# EAGLE board openmv-mp (EAGLE 9.1.2)
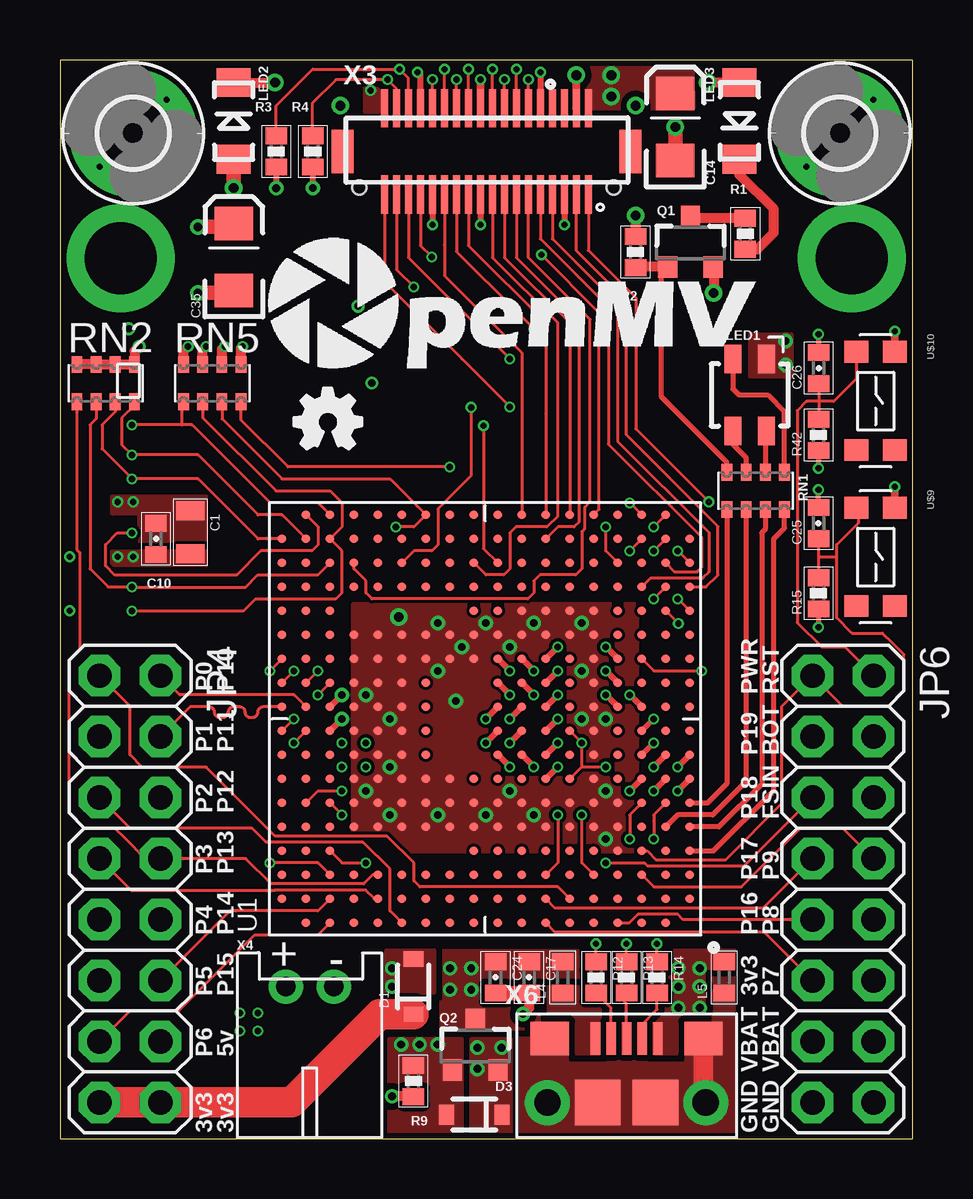
[diagram p0: board, top side]
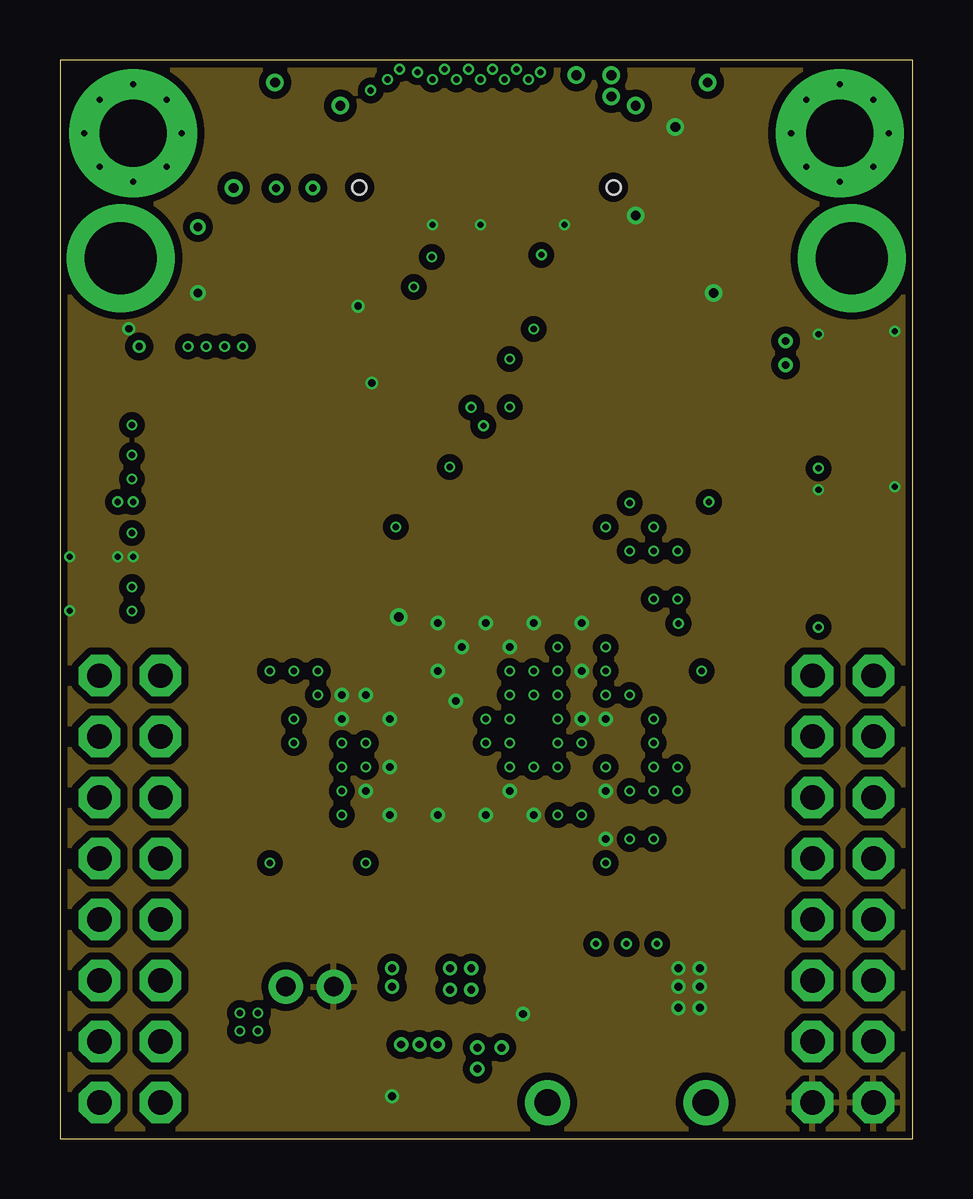
[diagram p1: board, inner layer GND]
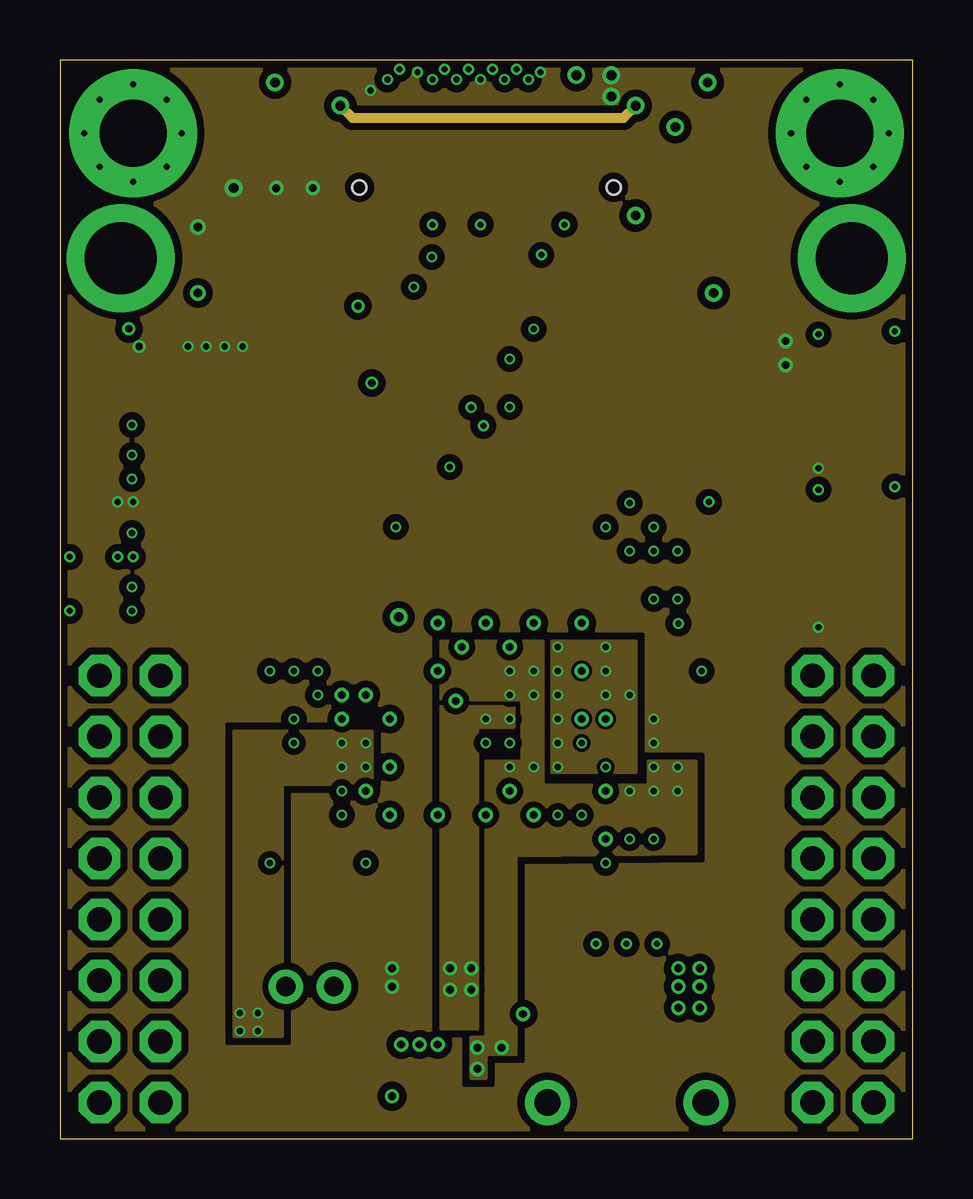
[diagram p2: board, inner layer 3V3]
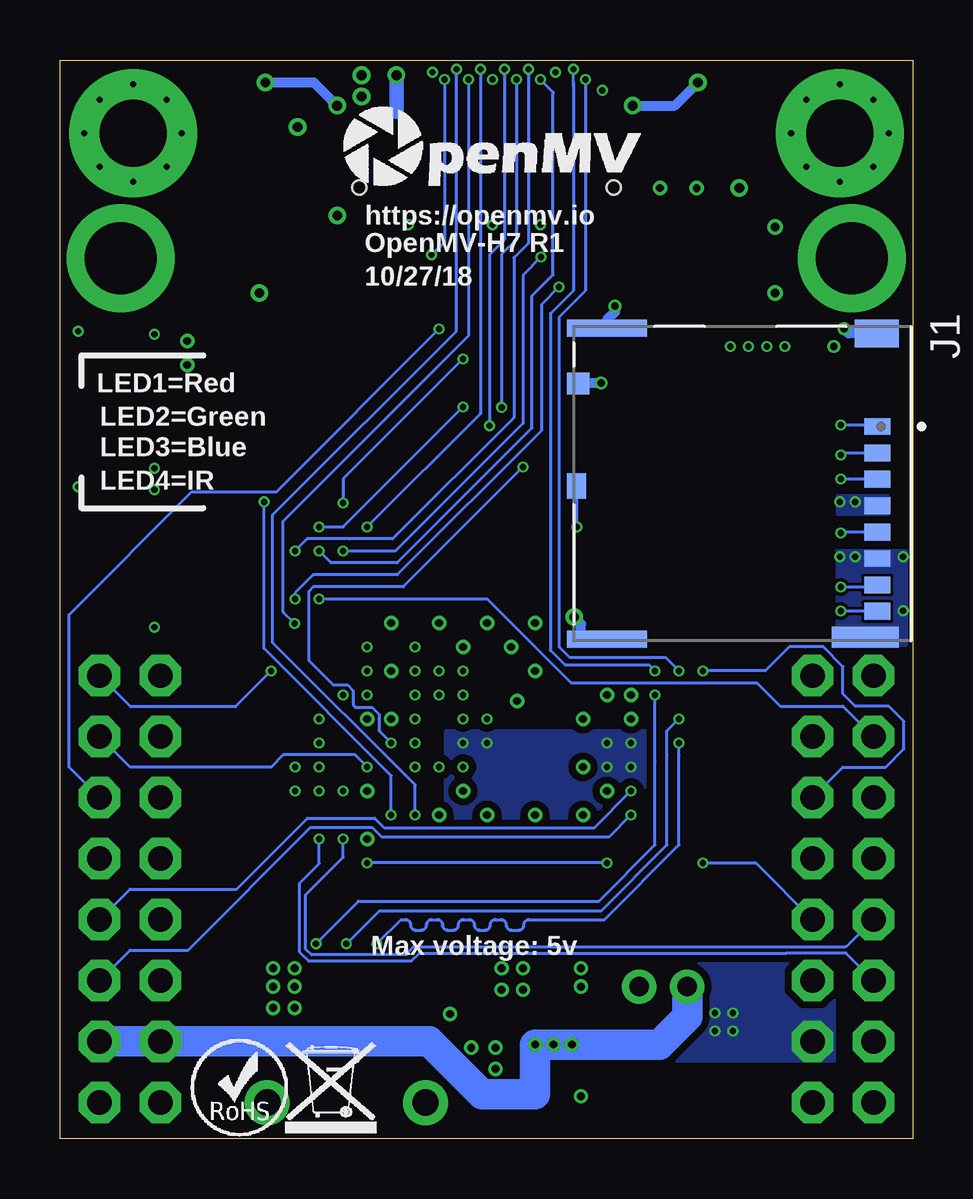
[diagram p3: board, bottom side, seen from below]

Size 35.56 x 44.96 mm. Coordinates in mm from the lower left corner, seen from the top.
Outline: 0,44.96 0,0 35.56,0 35.56,44.96 0,44.96
Copper layers (1*2+15*16): Top 0.035mm / dielectric 1.5mm / GND 0.035mm / dielectric 0.15mm / 3V3 0.035mm / dielectric 0.2mm / Bottom 0.035mm
Design rules "default": minimum track width 5mil, minimum drill 10mil, track to track 5mil, track to pad 5mil, pad to pad 5mil, via to via 5mil, smd to smd 5mil, copper to edge 5mil, drill to drill 10mil, minimum pad ring 10mil, minimum via ring 4mil, stop-mask expansion 2mil, vias tented up to drill 30mil, thermal gap 10mil

## Footprints (pad centres in the part's own frame; a part is rotated, then mirrored left to right if it is on the bottom)
0805 = smd 0.8 x 1.2: 1 -0.9,0; 2 0.9,0
0402-CAP = smd 0.7 x 0.9: 1 -0.65,0; 2 0.65,0
EIA3216 = smd 1.4 x 1.6: A 1.4,0; C -1.4,0
SOD-323 = smd 0.63 x 0.83: 1 -1.15,0; 2 1.15,0
2,8-PAD = drill 2.8 pad 5.334: B2,8 0,0
MOLEX_503398-1892 = smd 0.7 x 1.1: 1 -2.38,5.625; 2 -1.28,5.625; 3 -0.18,5.625; 4 0.92,5.625; 5 2.02,5.625; 6 3.12,5.625; 7 4.22,5.625; 8 5.32,5.625 | smd 0.9 x 0.93: 9 -4.17,-6.84 | smd 1.05 x 0.78: 10 0.095,-6.915 | smd 1.14 x 1.83: P1 -6.26,5.61 | smd 0.86 x 2.8: P2 6.4,5.125 | smd 0.7 x 3.33: P3 -6.48,-5.64; P4 6.48,-5.64
2X08 = drill 1.016 octagon: 1 -8.89,-1.27; 2 -8.89,1.27; 3 -6.35,-1.27; 4 -6.35,1.27; 5 -3.81,-1.27; 6 -3.81,1.27; 7 -1.27,-1.27; 8 -1.27,1.27; 9 1.27,-1.27; 10 1.27,1.27; 11 3.81,-1.27; 12 3.81,1.27; 13 6.35,-1.27; 14 6.35,1.27; 15 8.89,-1.27; 16 8.89,1.27
C0402 = smd 0.7 x 0.9: 1 -0.65,0; 2 0.65,0
LED-TRICOLOR-SMD-MF = smd 0.7 x 1.2: A 0.7,1.5; B 0.7,-1.5; G -0.7,-1.5; R -0.7,1.5
LED-1206 = smd 1.2 x 1.4: A -1.6,0; C 1.6,0
9774030151R = drill 3 pad 4.5: P$1 0,0
SOT23-3 = smd 0.8 x 0.9: 1 -0.95,-1; 2 0.95,-1; 3 0,1.1
0402-RES = smd 0.7 x 0.9: 1 -0.65,0; 2 0.65,0
EXBV8V = smd 0.45 x 0.7: 1 -1.2,-0.775; 2 -0.4,-0.775; 3 0.4,-0.775; 4 1.2,-0.775; 5 1.2,0.775; 6 0.4,0.775; 7 -0.4,0.775; 8 -1.2,0.775
OSD32MP15X-BGA-324 = smd 0.35 x 0.35: A2 -8.5,-7.5; A3 -8.5,-6.5; A4 -8.5,-5.5; A5 -8.5,-4.5; A6 -8.5,-3.5; A7 -8.5,-2.5; A8 -8.5,-1.5; A9 -8.5,-0.5; A10 -8.5,0.5; A11 -8.5,1.5; A12 -8.5,2.5; A13 -8.5,3.5; A14 -8.5,4.5; A15 -8.5,5.5; A16 -8.5,6.5; A17 -8.5,7.5; B1 -7.5,-8.5; B2 -7.5,-7.5; B3 -7.5,-6.5; B4 -7.5,-5.5; B5 -7.5,-4.5; B6 -7.5,-3.5; B7 -7.5,-2.5; B8 -7.5,-1.5; B9 -7.5,-0.5; B10 -7.5,0.5; B11 -7.5,1.5; B12 -7.5,2.5; B13 -7.5,3.5; B14 -7.5,4.5; B15 -7.5,5.5; B16 -7.5,6.5; B17 -7.5,7.5; B18 -7.5,8.5; C1 -6.5,-8.5; C2 -6.5,-7.5; C3 -6.5,-6.5; C4 -6.5,-5.5; C5 -6.5,-4.5; C6 -6.5,-3.5; C7 -6.5,-2.5; C8 -6.5,-1.5; C9 -6.5,-0.5; C10 -6.5,0.5; C11 -6.5,1.5; C12 -6.5,2.5; C13 -6.5,3.5; C14 -6.5,4.5; C15 -6.5,5.5; C16 -6.5,6.5; C17 -6.5,7.5; C18 -6.5,8.5; D1 -5.5,-8.5; D2 -5.5,-7.5; D3 -5.5,-6.5; D4 -5.5,-5.5; D5 -5.5,-4.5; D6 -5.5,-3.5; D7 -5.5,-2.5; D8 -5.5,-1.5; D9 -5.5,-0.5; D10 -5.5,0.5; D16 -5.5,6.5; D17 -5.5,7.5; D18 -5.5,8.5; E1 -4.5,-8.5; E2 -4.5,-7.5; E3 -4.5,-6.5; E4 -4.5,-5.5; E5 -4.5,-4.5; E6 -4.5,-3.5; E7 -4.5,-2.5; E8 -4.5,-1.5; E9 -4.5,-0.5; E10 -4.5,0.5; E11 -4.5,1.5; E12 -4.5,2.5; E13 -4.5,3.5; E14 -4.5,4.5; E15 -4.5,5.5; E16 -4.5,6.5; E17 -4.5,7.5; E18 -4.5,8.5; F1 -3.5,-8.5; F2 -3.5,-7.5; F3 -3.5,-6.5; F4 -3.5,-5.5; F5 -3.5,-4.5; F6 -3.5,-3.5; F7 -3.5,-2.5; F8 -3.5,-1.5; F9 -3.5,-0.5; F10 -3.5,0.5; F11 -3.5,1.5; F12 -3.5,2.5; F13 -3.5,3.5; F14 -3.5,4.5; F15 -3.5,5.5; F16 -3.5,6.5; F17 -3.5,7.5; F18 -3.5,8.5; G1 -2.5,-8.5; G2 -2.5,-7.5; G3 -2.5,-6.5; G4 -2.5,-5.5; G5 -2.5,-4.5; G6 -2.5,-3.5; G7 -2.5,-2.5; G8 -2.5,-1.5; G9 -2.5,-0.5; G10 -2.5,0.5; G11 -2.5,1.5; G12 -2.5,2.5; G13 -2.5,3.5; G14 -2.5,4.5; G15 -2.5,5.5; G16 -2.5,6.5; G17 -2.5,7.5; G18 -2.5,8.5; H1 -1.5,-8.5; H2 -1.5,-7.5; H3 -1.5,-6.5; H4 -1.5,-5.5; H5 -1.5,-4.5; H6 -1.5,-3.5; H7 -1.5,-2.5; H8 -1.5,-1.5; H9 -1.5,-0.5; H12 -1.5,2.5; H13 -1.5,3.5; H14 -1.5,4.5; H15 -1.5,5.5; H16 -1.5,6.5; H17 -1.5,7.5; H18 -1.5,8.5; J1 -0.5,-8.5; J2 -0.5,-7.5; J3 -0.5,-6.5; J4 -0.5,-5.5; J5 -0.5,-4.5; J6 -0.5,-3.5; J7 -0.5,-2.5; J8 -0.5,-1.5; J9 -0.5,-0.5; J12 -0.5,2.5; J13 -0.5,3.5; J14 -0.5,4.5; J15 -0.5,5.5; J16 -0.5,6.5; J17 -0.5,7.5; J18 -0.5,8.5; K1 0.5,-8.5; K2 0.5,-7.5; K3 0.5,-6.5; K4 0.5,-5.5; K5 0.5,-4.5; K6 0.5,-3.5; K7 0.5,-2.5; K8 0.5,-1.5; K9 0.5,-0.5; K12 0.5,2.5; K13 0.5,3.5; K14 0.5,4.5; K15 0.5,5.5; K16 0.5,6.5; K17 0.5,7.5; K18 0.5,8.5; L1 1.5,-8.5; L2 1.5,-7.5; L3 1.5,-6.5; L4 1.5,-5.5; L5 1.5,-4.5; L6 1.5,-3.5; L7 1.5,-2.5; L8 1.5,-1.5; L9 1.5,-0.5; L12 1.5,2.5; L13 1.5,3.5; L14 1.5,4.5; L15 1.5,5.5; L16 1.5,6.5; L17 1.5,7.5; L18 1.5,8.5; M1 2.5,-8.5; M2 2.5,-7.5; M3 2.5,-6.5; M4 2.5,-5.5; M5 2.5,-4.5; M6 2.5,-3.5; M7 2.5,-2.5; M8 2.5,-1.5; M9 2.5,-0.5; M10 2.5,0.5; M11 2.5,1.5; M12 2.5,2.5; M13 2.5,3.5; M14 2.5,4.5; M15 2.5,5.5; M16 2.5,6.5; M17 2.5,7.5; M18 2.5,8.5; N1 3.5,-8.5; N2 3.5,-7.5; N3 3.5,-6.5; N4 3.5,-5.5; N5 3.5,-4.5; N6 3.5,-3.5; N7 3.5,-2.5; N8 3.5,-1.5; N9 3.5,-0.5; N10 3.5,0.5; N11 3.5,1.5; N12 3.5,2.5; N13 3.5,3.5; N14 3.5,4.5; N15 3.5,5.5; N16 3.5,6.5; N17 3.5,7.5; N18 3.5,8.5; P1 4.5,-8.5; P2 4.5,-7.5; P3 4.5,-6.5; P4 4.5,-5.5; P5 4.5,-4.5; P6 4.5,-3.5; P7 4.5,-2.5; P8 4.5,-1.5; P9 4.5,-0.5; P10 4.5,0.5; P16 4.5,6.5; P17 4.5,7.5; P18 4.5,8.5; R1 5.5,-8.5; R2 5.5,-7.5; R3 5.5,-6.5; R4 5.5,-5.5; R5 5.5,-4.5; R6 5.5,-3.5; R7 5.5,-2.5; R8 5.5,-1.5; R9 5.5,-0.5; R10 5.5,0.5; R11 5.5,1.5; R12 5.5,2.5; R13 5.5,3.5; R14 5.5,4.5; R15 5.5,5.5; R16 5.5,6.5; R17 5.5,7.5; R18 5.5,8.5; T1 6.5,-8.5; T2 6.5,-7.5; T3 6.5,-6.5; T4 6.5,-5.5; T5 6.5,-4.5; T6 6.5,-3.5; T7 6.5,-2.5; T8 6.5,-1.5; T9 6.5,-0.5; T10 6.5,0.5; T11 6.5,1.5; T12 6.5,2.5; T13 6.5,3.5; T14 6.5,4.5; T15 6.5,5.5; T16 6.5,6.5; T17 6.5,7.5; T18 6.5,8.5; U1 7.5,-8.5; U2 7.5,-7.5; U3 7.5,-6.5; U4 7.5,-5.5; U5 7.5,-4.5; U6 7.5,-3.5; U7 7.5,-2.5; U8 7.5,-1.5; U9 7.5,-0.5; U10 7.5,0.5; U11 7.5,1.5; U12 7.5,2.5; U13 7.5,3.5; U14 7.5,4.5; U15 7.5,5.5; U16 7.5,6.5; U17 7.5,7.5; U18 7.5,8.5; V2 8.5,-7.5; V3 8.5,-6.5; V4 8.5,-5.5; V5 8.5,-4.5; V6 8.5,-3.5; V7 8.5,-2.5; V8 8.5,-1.5; V9 8.5,-0.5; V10 8.5,0.5; V11 8.5,1.5; V12 8.5,2.5; V13 8.5,3.5; V14 8.5,4.5; V15 8.5,5.5; V16 8.5,6.5; V17 8.5,7.5
KMS221G = smd 0.9 x 1: P$1 -2.05,0.8; P$2 2.05,0.8; P$3 -2.05,-0.8; P$4 2.05,-0.8
DF12-36-DS = smd 0.3 x 1.6: 1 4.25,-1.8; 2 4.25,1.8; 3 3.75,-1.8; 4 3.75,1.8; 5 3.25,-1.8; 6 3.25,1.8; 7 2.75,-1.8; 8 2.75,1.8; 9 2.25,-1.8; 10 2.25,1.8; 11 1.75,-1.8; 12 1.75,1.8; 13 1.25,-1.8; 14 1.25,1.8; 15 0.75,-1.8; 16 0.75,1.8; 17 0.25,-1.8; 18 0.25,1.8; 19 -0.25,-1.8; 20 -0.25,1.8; 21 -0.75,-1.8; 22 -0.75,1.8; 23 -1.25,-1.8; 24 -1.25,1.8; 25 -1.75,-1.8; 26 -1.75,1.8; 27 -2.25,-1.8; 28 -2.25,1.8; 29 -2.75,-1.8; 30 -2.75,1.8; 31 -3.25,-1.8; 32 -3.25,1.8; 33 -3.75,-1.8; 34 -3.75,1.8; 35 -4.25,-1.8; 36 -4.25,1.8 | smd 0.9 x 1.8: F1 6,0; F2 -6,0 | hole 0.6: 5.3,-1.5; -5.3,-1.5
JST-PH-2-THM-RA = drill 0.8 pad 1.422: 1 1,0; 2 -1,0
MICROUSB-RIGHT = smd 0.4 x 1.35: 1 -1.3,1.27; 2 -0.65,1.27; 3 0,1.27; 4 0.65,1.27; 5 1.3,1.27 | drill 1.1: S1 -3.3,-1.405; S2 3.3,-1.405 | smd 1.6 x 1.4: S3 -3.2,1.27; S4 3.2,1.27 | smd 1.9 x 1.9: S5 -1.2,-1.405; S6 1.2,-1.405

## Placement (x,y rotation side)
C1  22uF  [0805]  5.43,25.28 270 top
C10  0.1uF  [0402-CAP]  4,25.01 270 top
C14  47uF  [EIA3216]  25.65,42.16 90 top
C17  0.1uF  [0402-CAP]  19.56,6.73 270 top
C24  10uF  [0402-CAP]  18.16,6.73 270 top
C25  0.01uF  [0402-CAP]  31.62,25.66 90 top
C26  0.01uF  [0402-CAP]  31.63,32.12 90 top
C35  100uF  [EIA3216]  7.25,36.75 90 top
D1  SDM2U20SD3-7  [SOD-323]  14.73,6.35 90 top
D3  SDM2U20SD3-7  [SOD-323]  17.27,1.02 180 top
H1  MOUNT-PAD-ROUND2.8  [2,8-PAD]  3.05,41.91 90 top
H2  MOUNT-PAD-ROUND2.8  [2,8-PAD]  32.51,41.91 270 top
J1  503398-1892  [MOLEX_503398-1892]  7.11,27.3 270 bottom
JP4  [2X08]  2.92,10.41 270 top
JP6  [2X08]  32.64,10.41 270 top
L4  MPZ1608S181ATAH0  [C0402]  20.95,6.73 90 top
L5  MPZ1608S181ATAH0  [C0402]  27.69,6.73 90 top
LED1  LED-TRICOLOR  [LED-TRICOLOR-SMD-MF]  28.75,31 0 top
LED2  VSMY12850  [LED-1206]  7.24,42.42 90 top
LED3  VSMY12850  [LED-1206]  28.32,42.42 270 top
LOGO1  OSHW_LOGO_FILLX0100-NT  [OSHW_FILLX100_NOTEXT]  9.75,28.75 0 top
M1  9774030243R  [9774030151R]  2.54,36.7 0 top
M2  9774030243R  [9774030151R]  33.02,36.7 0 top
Q1  BSS138  [SOT23-3]  26.28,37.34 0 top
Q2  Si2301BDS  [SOT23-3]  17.31,3.88 0 top
R1  10R  [0402-RES]  28.57,37.72 270 top
R2  10K  [0402-RES]  24,36.96 270 top
R3  4.7K  [0402-RES]  9.02,41.15 90 top
R4  4.7K  [0402-RES]  10.54,41.15 90 top
R9  10K  [0402-RES]  14.73,2.41 90 top
R12  22R  [0402-RES]  22.35,6.73 270 top
R13  22R  [0402-RES]  23.62,6.73 270 top
R14  22R  [0402-RES]  24.89,6.73 270 top
R15  10K  [0402-RES]  31.62,22.74 90 top
R42  10K  [0402-RES]  31.62,29.34 90 top
RN1  220R  [EXBV8V]  29,27 180 top
RN2  10K  [EXBV8V]  1.91,31.5 0 top
RN5  10K  [EXBV8V]  6.35,31.5 0 top
U1  OSD32MP157C-512M-BAA  [OSD32MP15X-BGA-324]  17.75,17.5 90 top
U$1  [WEEE]  26.16,0.25 0 bottom
U$2  [ROHS]  30.1,0.13 0 bottom
U$3  [OMV-LOGO]  23.88,39.5 0 bottom
U$6  [OMV-LOGO-BIG]  8.7,32.12 0 top
U$9  SWITCHKMS221G  [KMS221G]  34,24.25 270 top
U$10  SWITCHKMS221G  [KMS221G]  34,30.75 270 top
X3  DF12-36-DS  [DF12-36-DS]  17.78,41.15 0 top
X4  S2B-PH-K-S(LF)(SN)  [JST-PH-2-THM-RA]  10.41,6.35 180 top
X6  MF-CON-MICROUSB-RIGHT  [MICROUSB-RIGHT]  23.62,2.92 0 top

## Library data of the parts
C1 C10 C14 C17 C24-C26 C35 D1 D3 L4 L5 LED1-LED3 Q1 Q2 R1-R4 R9 R12-R15 R42 = sfe
H1 H2 = holes
J1 = 503398-1892; AVAILABILITY: Good; DESCRIPTION: 1.10mm Pitch microSD Memory Card Connector, Normal Mount Surface Mount, Push-Push Type, 1.28mm Height; MF: Molex; MP: 5033981892; PACKAGE: None; PRICE: 1.67 USD
JP4 JP6 = pinhead
LOGO1 = iofault
M1 M2 = STANDOFFS
RN1 RN2 RN5 = resistor-dil; OC_FARNELL: unknown; OC_NEWARK: unknown
U1 = Octavo-Systems
U$1-U$3 U$6 = openmv
U$9 U$10 = mux
X3 = DF12
X4 = adafruit-updated
X6 = MF_Connectors

## Nets
3V3: C1.1 C10.1 C14.A C35.A D1.2 J1.4 LED1.A LED2.A R3.1 R4.1 R15.1 R42.1 RN2.5 RN2.6 RN2.7 RN2.8 RN5.5 RN5.6 RN5.7 RN5.8 U1.H3 U1.J3 X3.2 X3.10 X3.20 X3.30 X3.36
3V3_OUT: D1.1 JP4.15 JP4.16
BOOT: JP6.4 RN5.4 U1.G6 U1.J6
DAC1: JP4.12 U1.B16
DAC2: JP4.13 U1.A16
DCMI_CLK: U1.V5 X3.12
DCMI_D0: U1.V3 X3.31
DCMI_D1: U1.U3 X3.29
DCMI_D2: U1.V2 X3.35
DCMI_D3: U1.U2 X3.28
DCMI_D4: U1.T1 X3.26
DCMI_D5: U1.P1 X3.33
DCMI_D6: U1.T13 X3.24
DCMI_D7: U1.T9 X3.22
DCMI_D8: U1.R1 X3.3
DCMI_D9: U1.C5 X3.1
DCMI_D10: U1.R3 X3.7
DCMI_D11: U1.T2 X3.9
DCMI_FSIN: JP6.6 X3.23
DCMI_HSYNC: U1.T4 X3.18
DCMI_PCLK: U1.C7 X3.14
DCMI_PWDN: U1.V8 X3.25
DCMI_RST: U1.V7 X3.21
DCMI_VSYNC: U1.P2 X3.16
EEPROM_WP: U1.P4
GND: C1.2 C10.2 C14.C C17.2 C24.2 C25.2 C26.2 C35.C J1.6 J1.9 J1.P1 J1.P2 J1.P3 J1.P4 JP6.15 JP6.16 L5.2 Q1.2 R2.1 R9.1 U1.D4 U1.E4 U1.E5 U1.E6 U1.E7 U1.E8 U1.E9 U1.E10 U1.E11 U1.E12 U1.E13 U1.E14 U1.E15 U1.F4 U1.F5 U1.F6 U1.F7 U1.F8 U1.F9 U1.F10 U1.F11 U1.F12 U1.F13 U1.F14 U1.F15 U1.G5 U1.G11 U1.G12 U1.G13 U1.G14 U1.G15 U1.H5 U1.H13 U1.H14 U1.H15 U1.J5 U1.J13 U1.J14 U1.J15 U1.J16 U1.K5 U1.K13 U1.K14 U1.K15 U1.K16 U1.L5 U1.L13 U1.L14 U1.L15 U1.M5 U1.M10 U1.M11 U1.M12 U1.M13 U1.M14 U1.M15 U1.N5 U1.N6 U1.N7 U1.N8 U1.N9 U1.N10 U1.N11 U1.N12 U1.N13 U1.N14 U1.N15 U1.P5 U1.P6 U1.P7 U1.P8 U$9.P$1 U$10.P$1 X3.5 X3.19 X3.27 X4.2 X6.5
I2C2_SCL: JP4.9 U1.F3
I2C2_SDA: JP4.11 U1.F2
I2C5_SCL: R3.2 U1.L17 X3.32
I2C5_SDA: R4.2 U1.L18 X3.34
LED_B: RN1.7 U1.E1
LED_G: RN1.6 U1.E2
LED_IR: RN1.5 U1.F1
LED_R: RN1.8 U1.D1
N$4: JP6.3
N$5: Q1.1 R2.2 RN1.4
N$6: LED1.B RN1.2
N$8: LED1.R RN1.1
N$9: LED1.G RN1.3
N$10: LED3.C R1.2
N$14: Q1.3 R1.1
N$17: LED2.C LED3.A
N$34: L4.1 X6.1
N$35: R12.2 X6.2
N$36: R13.2 X6.3
N$37: R14.2 X6.4
N$38: L5.1 X6.S1 X6.S2 X6.S3 X6.S4 X6.S5 X6.S6
NRST: C26.1 JP6.2 R42.2 U1.M3 U$10.P$3
OTG_HS_DN: R12.1 U1.J17
OTG_HS_DP: R13.1 U1.J18
OTG_HS_ID: R14.1 U1.L16
PONKEY: C25.1 JP6.1 R15.2 U1.D3 U$9.P$3
RSVD5: X3.8
RSVD6: X3.6
SDMMC1_CK: J1.5 U1.V17
SDMMC1_CMD: J1.3 RN2.3 U1.U18
SDMMC1_D0: J1.7 RN2.2 U1.T16
SDMMC1_D1: J1.8 RN5.2 U1.U16
SDMMC1_D2: J1.1 RN5.1 U1.V16
SDMMC1_D3: J1.2 RN2.4 U1.U17
SDMMC2_CK: U1.T12
SDMMC2_CMD: U1.U15
SDMMC2_D0: U1.T14
SDMMC2_D1: U1.V13
SDMMC2_D2: U1.V14
SDMMC2_D3: U1.U14
SDMMC2_D4: U1.T17
SDMMC2_D5: U1.U12
SDMMC2_D6: U1.V15
SDMMC2_D7: U1.T11
SPI2_MISO: JP4.3 U1.R2
SPI2_MOSI: JP4.1 U1.B6
SPI2_NSS: JP4.7 U1.B14
SPI2_SCLK: JP4.5 U1.A13
SPI3_MISO: U1.V6 X3.15
SPI3_MOSI: U1.T10 X3.17
SPI3_SCLK: U1.U7 X3.13
SPI3_SSEL: U1.T15 X3.11
SPI6_MISO: JP6.9 U1.A4
SPI6_MOSI: JP6.11 U1.A7
SPI6_NSS: JP6.5 U1.D16
SPI6_SCLK: JP6.7 U1.B7
TIM2_CH2: JP4.10 U1.C16
TIM4_CH1: JP6.12 U1.F16
TIM4_CH2: JP6.10 U1.F17
TIM4_CH3: JP6.8 U1.C3
UART4_RX: JP4.6 U1.M18
UART4_TX: JP4.8 RN2.1 U1.C14
USBH_DM: JP4.4 U1.K18
USBH_DP: JP4.2 U1.K17
USD_DETECT: J1.10 RN5.3 U1.V12
VBAT: D3.2 JP6.13 JP6.14 Q2.1 R9.2 X4.1
VBUS: C17.1 C24.1 L4.2 Q2.3 U1.K8 U1.K9
VBUS_SW: JP4.14 U1.J8 U1.J9
VDD: U1.G7 U1.H7 U1.J7 U1.K3 U1.K4 U1.K7 U1.L4 U1.L7 U1.M4 U1.M7
VDDA: X3.4
VIN: D3.1 Q2.2 U1.G1 U1.G2 U1.G3 U1.H1 U1.H2 U1.H8 U1.H9 U1.L8 U1.L9 U1.M8 U1.M9

## Tracks (layer width: path | path; a pad name or v marks a point on that pad's centre or on a via)
3V3  (via drill 0.25, 0.3, 0.33, 0.35, 0.41)
  Top 0.203: v24.75,17.5 U1.J3 | U1.H3 v24.75,16.5 | R15.1 v31.62,21.33 | R42.1 v31.62,27.94
  Top 0.254: R4.1 v10.54,39.62 | R3.1 v9.02,39.62 | X3.30 15.03,44.32 v14.9,44.45 | v20.03,44.45 X3.10
  Top 0.305: X3.20 v17.53,44.15
  Top 0.406: v3.3,33.02 3.1,32.82 RN2.5 RN2.6 RN2.7 RN2.8 | RN5.8 5.15,32.84 v5.33,33.02 | RN5.7 5.95,32.87 v6.1,33.02 | RN5.5 7.55,32.95 v7.62,33.02 | RN5.6 6.75,32.91 v6.86,33.02
  Top 0.61: LED2.A v7.24,39.62 | v5.75,38 7.1,38 C35.A
  other vias: 3.05,26.54 2.41,26.54 30.25,33.25 30.25,32.25 22.99,44.32 22.99,43.43 12.95,43.69 13.84,7.11 13.84,6.35
  pour Top (no thermals): 2.16,26.8 6.1,26.8 6.1,24.89 3.3,24.89 3.3,26.04 2.16,26.04
  pour Bottom (no thermals): 1.02,26.8 3.17,26.8 3.17,26.04 1.02,26.04
  pour 3V3 (isolate 0.305, rank 6): 0.38,0.38 0.38,44.58 35.18,44.58 35.18,0.38
  pour Top (isolate 0.254, no thermals): 28.75,33.53 28.75,31.75 30.5,31.75 30.5,33.53
  pour Top (isolate 0.254, no thermals): 21.97,44.7 21.97,42.93 26.42,42.93 26.42,44.7
  pour Top (isolate 0.254, no thermals): 12.7,44.07 12.7,42.8 13.65,42.8 13.65,44.07
  pour Top (isolate 0.254, no thermals): 13.59,7.87 13.59,6.1 15.62,6.1 15.62,7.87
3V3_OUT
  Top 1.27: JP4.15 JP4.16 9.65,1.52 13.33,5.2 D1.1
BOOT  (via drill 0.25)
  Top 0.127: U1.J6 v21.75,16.5 21.75,15.5 | v16.25,28 9.5,28 7.55,29.95 RN5.4 | U1.G6 21.75,15.5 | 21.75,15.5 v22.75,15.5
  Bottom 0.127: v16.25,28 21.25,23 25,23 25.2,22.8 25.2,19.95 24.17,18.92 23.58,18.92 23.33,18.67 23.33,18.08 23.24,17.99 22.55,17.99 22.26,17.7 | JP6.4 32.64,15.49 26.76,15.49 26.25,16 23.25,16 v22.75,15.5 | v21.75,16.5 22.26,17.01 22.26,17.5 | 22.26,17.7 22.26,17.5 | 22.26,17.7 22.26,17.5
DAC1
  Top 0.127: U1.B16 10.75,9.5 7.34,9.5 7.09,9.5 JP4.12
DAC2
  Top 0.127: U1.A16 10.75,8.5 8.12,8.5 4.95,5.33 2.92,5.33 JP4.13
DCMI_CLK  (via drill 0.25)
  Top 0.127: X3.12 v19.53,44.15 | v20.07,36.84 22.48,34.42 22.48,26.23 U1.V5
  Bottom 0.127: v19.53,44.15 19.53,37.37 v20.07,36.84
DCMI_D0  (via drill 0.25)
  Top 0.127: X3.31 14.53,36.72 v18.75,32.5 | U1.V3 v23.75,26.5
  Bottom 0.127: v18.75,32.5 23.75,27.5 v23.75,26.5
DCMI_D1  (via drill 0.25)
  Top 0.127: X3.29 15.03,37.22 v15.5,36.75 | U1.U3 v23.75,24.5
  Bottom 0.127: v23.75,24.5 21.57,24.5 16.26,29.82 16.26,35.99 v15.5,36.75
DCMI_D2  (via drill 0.25)
  Top 0.127: v18.75,30.5 16.75,32.5 13.53,35.72 X3.35 | U1.V2 v24.75,25.5
  Bottom 0.127: v18.75,30.5 23.75,25.5 v24.75,25.5
DCMI_D3  (via drill 0.25)
  Top 0.127: X3.28 v15.53,44.15 | U1.U2 v24.75,24.5
  Bottom 0.127: v24.75,24.5 24.25,24 21.5,24 15.88,29.62 15.88,35.12 15,36 15,43.56 | 15,43.56 15,43.58 | v15.53,44.15 15,43.62 15,43.56
DCMI_D4  (via drill 0.25)
  Top 0.127: X3.26 v16.03,44.58 | U1.T1 v25.75,24.5
  Bottom 0.127: v25.75,24.5 25.25,25 23.49,25 21.7,25 16.64,30.06 16.64,36.72 16.03,37.33 v16.03,44.58
DCMI_D5  (via drill 0.25)
  Top 0.127: U1.P1 v25.75,22.5 | X3.33 14.03,36.22 v14.75,35.5
  Bottom 0.127: v14.75,35.5 15.49,34.76 15.49,29.51 21.5,23.5 25,23.5 25.75,22.75 v25.75,22.5
DCMI_D6  (via drill 0.25)
  Top 0.127: X3.24 v16.53,44.15 | U1.T13 14.75,24.5 15.5,24.5 15.75,24.75 15.75,26.25 17.14,27.64 v17.14,30.48
  Bottom 0.127: v16.53,44.15 16.53,37.85 16.53,37.47 17.14,36.85 v17.14,30.48
DCMI_D7  (via drill 0.25)
  Top 0.127: X3.22 v17.03,44.58 | v17.65,29.72 17.65,24.6 U1.T9
  Bottom 0.127: v17.03,44.58 17.03,37.47 17.65,36.85 v17.65,29.72 | v17.65,29.72
DCMI_D8
  Top 0.127: U1.R1 26.94,23 27.43,23.5 27.43,25.53 23.62,29.34 23.62,34.92 21.53,37.02 X3.3
DCMI_D9  (via drill 0.25)  (1 unrouted)
  Top 0.127: U1.C5 21.75,11.5 v21.75,13.5 | v27.05,26.54 24,29.59 24,35.05 22.03,37.02 X3.1 | v27.05,26.54
  Bottom 0.127: v21.75,13.5 21.75,15.14 27.05,20.44 v27.05,26.54
DCMI_D10
  Top 0.127: U1.R3 24.63,23.38 26.81,23.38 27.05,23.62 27.05,25.27 23.24,29.08 23.24,34.8 20.53,37.51 X3.7
DCMI_D11
  Top 0.127: U1.T2 25.62,23.63 26.55,23.63 26.75,23.83 26.75,25.07 22.86,28.96 22.86,34.67 20.03,37.5 X3.9
DCMI_FSIN  (via drill 0.25)
  Top 0.127: v19.75,33.75 19,34.5 16.53,36.97 X3.23
  Bottom 0.127: JP6.6 35.18,15.49 35.18,21.84 30.06,26.96 26.54,26.96 v19.75,33.75
DCMI_HSYNC  (via drill 0.25)
  Top 0.127: X3.18 v18.03,44.58 | U1.T4 22.75,24.5 v22.75,25.5
  Bottom 0.127: v18.03,44.58 18.03,30.22 v22.75,25.5
DCMI_PCLK  (via drill 0.25)
  Top 0.127: X3.14 v19.03,44.58 | U1.C7 20.75,11.5 v20.75,13.5
  Bottom 0.127: v19.03,44.58 19.03,33.66 26.69,26 26.69,20.69 20.75,14.75 v20.75,13.5
DCMI_PWDN
  Top 0.127: X3.25 16.03,37.25 16.03,35.97 19.25,32.75 U1.V8
DCMI_RST
  Top 0.127: X3.21 17.03,37.22 20.25,34 20.25,30.23 U1.V7
DCMI_VSYNC  (via drill 0.25)
  Top 0.127: X3.16 v18.53,44.15 | v25.78,21.48 U1.P2
  Bottom 0.127: v18.53,44.15 18.53,33.47 24,28 26.12,25.87 26.25,25.75 26.25,21.95 v25.78,21.48
GND  (via drill 0.25, 0.3, 0.33, 0.35, 0.4, 0.41, 0.41 pad 0.61)
  Top 0.203: C25.2 v31.62,27.05 | C26.2 v31.63,33.52 v31.62,33.53
  Top 0.254: X3.19 v17.53,38.1 | X3.27 v15.53,38.1 | X3.5 v21.03,38.1 | U1.J16 v11.75,17.5 | U1.K16 v11.75,18.5
  Top 0.305: U$9.P$1 v34.8,27.18 | U$10.P$1 v34.8,33.65 v34.8,33.66
  Top 0.406: v24,38.48 R2.1 | v13.84,1.78 14.72,1.78 R9.1 | v27.25,35.25 27.25,36.32 Q1.2 | C17.2 19.56,5.46 v19.3,5.21
  Top 0.61: C14.C v25.65,42.16 | C17.2 C24.2 | v5.75,35.25 7.15,35.25 C35.C
  Bottom 0.406: J1.P1 2.68,33.56 v2.87,33.75 | J1.P3 12.75,34.13 12.42,34.46 v12.42,34.71 | J1.9 13.93,31.5 v13,31.5 | v14.12,21.75 13.84,21.47 13.84,21.09 13.57,20.82 J1.P4
  other vias: 25.78,6.35 26.67,6.35 25.78,5.46 26.67,5.46 21.75,21.5 21.75,19.5 21.75,17.5 22.75,14.5 18.75,14.5 19.75,13.5 17.75,13.5 15.75,13.5 13.75,13.5 12.75,14.5 13.75,15.5 16.5,18.25 13.75,17.5 12.75,18.5 15.75,21.5 17.75,21.5 18.75,20.5 19.75,21.5 3.05,24.26 2.41,24.26 15.75,19.5 16.75,20.5 22.75,17.5 22.75,12.5 26.67,7.11 25.78,7.11 0.41,22.01 0.41,24.26
  pour GND (isolate 0.305): 0,0 0,44.96 35.56,44.96 35.56,0
  pour Top (isolate 0.254, rank 5, no thermals): 24.78,3.55 24.78,7.86 28.11,7.86 28.11,7.11 26.85,7.11 26.84,3.55
  pour Top (no thermals): 24,20.2 24,12 12.25,12 12.25,22.25 24,22.25
  pour Bottom (no thermals): 0.27,24.51 3.17,24.51 3.17,20.57 0.27,20.57
  pour Top (no thermals): 2.16,24.51 6.1,24.51 6.1,23.88 2.16,23.88
I2C2_SCL  (via drill 0.25)
  Top 0.127: v23.75,12.5 23.75,13.5 U1.F3
  Bottom 0.127: v23.75,12.5 23.75,11.74 25.31,10.18 25.31,7.91 25.07,7.67 21.16,7.67 20.82,8.02 2.81,8.02 | 2.81,8.02 | JP4.9 2.78,8.02 2.81,8.02
I2C2_SDA  (via drill 0.25)
  Top 0.127: v24.75,12.5 24.75,13.25 24.75,13.5 U1.F2
  Bottom 0.127: JP4.11 2.79,7.75 5.28,7.75 20.57,7.75 20.9,7.42 25.2,7.42 25.57,7.79 25.57,10.66 24.75,11.48 v24.75,12.5
I2C5_SCL  (via drill 0.25)
  Top 0.127: X3.32 14.53,44.2 v14.15,44.58 10.54,44.58 9.02,43.05 R3.2 | v10.75,19.5 U1.L17
  Bottom 0.127: 14.15,43.85 14.15,44 | 14.15,44 v14.15,44.58 | 14.15,44 14.15,35.35 15.11,34.39 15.11,20.36 14.5,19.75 11,19.75 v10.75,19.5
I2C5_SDA  (via drill 0.25)
  Top 0.127: X3.34 14.03,43.76 v13.65,44.15 11.51,44.15 10.54,43.18 R4.2 | v9.75,19.5 U1.L18
  Bottom 0.127: v13.65,44.15 13.65,35.35 14.73,34.27 14.73,20.48 14.32,20.07 10.32,20.07 v9.75,19.5
LED_B
  Top 0.203: U1.E1 27.48,13 29.25,14.77 29.25,25.25 29.4,25.4 RN1.7
LED_G
  Top 0.203: RN1.6 28.6,14.88 27.22,13.5 25.75,13.5 U1.E2
LED_IR
  Top 0.203: U1.F1 27,14 27.71,14.71 27.8,14.8 RN1.5
LED_R
  Top 0.203: U1.D1 27.24,12 29.75,14.51 29.75,25 30.2,25.45 RN1.8
N$1  (via drill 0.25)
  other vias: 3.05,43.94
N$3  (via drill 0.25)
  other vias: 5.08,41.91
N$5
  Top 0.2: Q1.1 25.17,36.34 25.08,36.25 25.08,30.92 27.8,28.2 RN1.4
  Top 0.406: R2.2 24.03,36.34 Q1.1
N$6
  Top 0.203: RN1.2 29.4,29.45 LED1.B
N$8
  Top 0.203: 30.2,27.9 RN1.1 30.2,30.3 29.5,31 28.31,31 28.05,31.26 LED1.R
N$9
  Top 0.203: LED1.G 28.05,28.95 28.6,28.4 RN1.3
N$10
  Top 0.406: R1.2 29.07,37.07 29.75,37.75 29.75,38.75 28.32,40.18 LED3.C
N$14
  Top 0.406: R1.1 26.35,38.37 Q1.3
N$15  (via drill 0.25)
  other vias: 1.02,41.91
N$16  (via drill 0.25)
  other vias: 3.05,39.88
N$17  (via drill 0.41)
  Top 0.406: LED2.C v8.97,44.02 | LED3.A v27,44.02
  3V3 0.406: v24,43.05 23.5,42.55 12.19,42.55 v11.68,43.05
  Bottom 0.406: v11.68,43.05 9.93,43.05 v8.97,44.02 | v24,43.05 24.97,44.02 v27,44.02
N$18  (via drill 0.25)
  other vias: 4.45,43.31
N$19  (via drill 0.25)
  other vias: 1.65,43.31
N$20  (via drill 0.25)
  other vias: 1.65,40.51
N$21  (via drill 0.25)
  other vias: 4.45,40.51
N$22  (via drill 0.25)
  other vias: 32.51,43.94
N$23  (via drill 0.25)
  other vias: 30.48,41.91
N$24  (via drill 0.25)
  other vias: 34.54,41.91
N$25  (via drill 0.25)
  other vias: 32.51,39.88
N$26  (via drill 0.25)
  other vias: 31.11,43.31
N$27  (via drill 0.25)
  other vias: 31.11,40.51
N$28  (via drill 0.25)
  other vias: 33.91,43.31
N$29  (via drill 0.25)
  other vias: 33.91,40.51
N$34
  pour Top (isolate 0.254, rank 2, no thermals): 21.77,6.35 20.37,6.35 20.37,4.95 21.52,4.95 21.52,3.55 21.92,3.55 22.53,3.55 22.53,6.35
N$35
  Top 0.127: X6.2 22.97,5.46 R12.2
N$36
  Top 0.127: X6.3 23.62,5.64 23.4,5.86 R13.2
N$37
  Top 0.127: X6.4 24.27,4.78 24.89,5.4 R14.2
N$38
  Top 0.813: X6.S4 26.82,1.62 X6.S2
  pour Top (isolate 0.254, rank 6, no thermals): 19.05,0.11 19.05,7.86 28.09,7.86 28.09,0.11
NRST  (via drill 0.25)
  Top 0.127: JP6.2 32.71,20.5 31.75,20.5 30.73,21.52 30.73,30.35 31.11,30.73 31.62,30.73 | 31.62,30.73 32.26,30.73 33.2,31.68 U$10.P$3 | C26.1 31.63,30.74 | 31.63,30.74 31.62,30.73 | 31.63,30.74 R42.2 | U1.M3 24.75,19.5 v26.75,19.5
  Top 0.15: U$10.P$3 33.15,32.75 | C26.1
  Bottom 0.127: JP6.2 32.6,18 28.25,18 v26.75,19.5
OTG_HS_DN  (via drill 0.25)
  Top 0.127: R12.1 v22.35,8.13 | v9.75,16.5 U1.J17
  Bottom 0.127: v9.75,16.5 9.75,16 9.75,12.25 12.86,9.14 16,9.14 arc-90 16.22,8.92 arc90 16.44,8.7 16.74,8.7 arc90 16.96,8.92 arc-90 17.18,9.14 17.4,9.14 arc-90 17.62,8.92 arc90 17.84,8.7 18.06,8.7 arc90 18.29,8.92 arc-90 18.51,9.14 18.73,9.14 arc-90 18.95,8.92 arc90 19.17,8.7 19.39,8.7 arc90 19.61,8.92 arc-90 19.84,9.14 20.06,9.14 arc-90 20.28,8.92 arc90 20.5,8.7 20.72,8.7 arc90 20.94,8.92 arc-90 21.16,9.14 21.34,9.14 v22.35,8.13
OTG_HS_DP  (via drill 0.25)
  Top 0.127: R13.1 v23.62,8.13 | v9.75,17.5 U1.J18
  Bottom 0.127: v9.75,17.5 10.25,17 10.25,16 10.25,12.25 12.99,9.51 22.24,9.51 v23.62,8.13
OTG_HS_ID  (via drill 0.25)
  Top 0.127: v10.75,18.5 U1.L16 | R14.1 v24.89,8.13
  Bottom 0.127: v10.75,18.5 10.75,15.75 10.75,12.25 13.09,9.91 23.11,9.91 v24.89,8.13
PONKEY
  Top 0.127: 32.38,24.26 32.38,21.72 33.02,21.08 34.29,21.08 34.73,20.64 35.18,20.19 35.18,18.67 34.54,18.03 32.64,18.03 JP6.1 30.1,18.03 30.1,13.98 27.75,11.63 24.85,11.63 24.48,12 U1.D3 | 32.38,24.26 32.38,24.77 33.27,25.66 33.27,26.23 U$9.P$3 | C25.1 31.62,24.26 | 31.62,24.26 32.38,24.26 | 31.62,24.26 R15.2
SDMMC1_CK  (via drill 0.25)
  Top 0.127: U1.V17 10.75,25.5 10.75,24.75 10.5,24.5 8.37,24.5 7.37,23.5 2.29,23.5 1.91,23.88 1.91,24.77 2.39,25.25 v3,25.25
  Bottom 0.127: J1.5 2.96,25.29 v3,25.25
SDMMC1_CMD  (via drill 0.25)
  Top 0.127: U1.U18 8.25,25 5.75,27.5 v3,27.5 1.75,28.75 1.75,29.75 2.31,30.31 RN2.3
  Bottom 0.127: v3,27.5 1.5,27.5 J1.3
SDMMC1_D0  (via drill 0.25)
  Top 0.127: U1.T16 10.75,23.5 9.91,23.5 8.25,23.5 7.73,22.99 3.01,22.99 v3,23 2,23 1.25,23.75 1.25,29.75 1.5,30 RN2.2
  Bottom 0.127: v3,23 2,23 1.57,23 J1.7
SDMMC1_D1  (via drill 0.25)
  Top 0.127: v3,22 7.65,22 8.15,22.5 11.5,22.5 11.75,22.75 11.75,24.5 U1.U16 11.75,25.5 11.75,26.5 11.25,27 9,27 5.95,30.05 RN5.2
  Bottom 0.127: v3,22 1.5,22 J1.8
SDMMC1_D2  (via drill 0.25)
  Top 0.127: U1.V16 10.75,26.5 8.75,26.5 5.5,29.75 5.08,29.75 | 5.08,29.75 v3,29.75 | RN5.1 5.08,30.65 5.08,29.75
  Bottom 0.127: v3,29.75 2.75,29.75 1.55,29.75 J1.1
SDMMC1_D3  (via drill 0.25)
  Top 0.127: U1.U17 9.25,26 8.25,26 5.75,28.5 v3,28.5 2.58,28.92 2.58,30.05 3.1,30.57 RN2.4
  Bottom 0.127: v3,28.5 2.92,28.59 J1.2
SPI2_MISO  (via drill 0.25)
  Top 0.127: U1.R2 v24.75,22.5
  Bottom 0.127: v24.75,22.5 17.75,22.5 14.25,19 9.5,19 6.5,19 5.53,18.03 2.92,18.03 JP4.3
SPI2_MOSI
  Top 0.127: U1.B6 20.75,10.5 15,10.5 14.75,10.75 14.75,11.5 13.63,12.62 12.5,12.62 | JP4.1 2.92,18.03 2.92,16 3.43,15.49 6.1,15.49 8.97,12.62 12.5,12.62 | 12.74,12.62 12.5,12.62
SPI2_NSS
  Top 0.127: JP4.7 2.97,10.37 8.97,10.37 12.75,10.37 13.11,10 U1.B14
SPI2_SCLK
  Top 0.127: U1.A13 13.75,9.5 13.75,11.25 | JP4.5 2.92,12.95 8,12.95 8.59,12.37 12.63,12.37 13.75,11.25 | 13.75,11.25
SPI3_MISO
  Top 0.127: U1.V6 21.25,34 18.53,36.72 X3.15
SPI3_MOSI
  Top 0.127: X3.17 18.03,36.72 20.75,34 20.75,25.96 20.29,25.5 19,25.5 18.75,25.25 18.75,23.75 18.5,23.5 17.75,23.5 U1.T10
SPI3_SCLK
  Top 0.127: U1.U7 20.75,25.5 21.44,25.5 21.63,25.7 21.63,34.12 19.03,36.72 X3.13
SPI3_SSEL
  Top 0.127: X3.11 19.53,36.72 22.1,34.15 22.1,26.54 21.88,26.33 21.88,25.44 21.75,25.31 21.75,23.75 21.5,23.5 20,23.5 19.75,23.25 19.75,22.75 19.5,22.5 13,22.5 12.75,22.75 12.75,23.25 12.25,23.75 U1.T15
SPI6_MISO
  Top 0.127: U1.A4 23.73,9 24.1,9.37 25.75,9.37 25.97,9.14 JP6.9
SPI6_MOSI
  Top 0.127: U1.A7 20.62,8.63 29.34,8.63 JP6.11
SPI6_NSS  (via drill 0.25)
  Top 0.127: U1.D16 11.75,11.5 v12.75,11.5 | v22.75,11.5 24.37,11.5 24.49,11.38 28.53,11.38 JP6.5
  Bottom 0.127: v12.75,11.5 v22.75,11.5
SPI6_SCLK
  Top 0.127: U1.B7 20.62,9.63 29.32,9.63 JP6.7
TIM2_CH2  (via drill 0.25)
  Top 0.127: U1.C16 10.75,11.5 v8.75,11.5
  Bottom 0.127: v8.75,11.5 6.55,11.5 JP4.10
TIM4_CH1  (via drill 0.25)
  Top 0.127: U1.F16 v11.75,13.5
  Bottom 0.127: JP6.12 32.64,7.87 30.22,7.87 25.11,12.99 22.55,12.99 22.13,12.57 12.68,12.57 v11.75,13.5
TIM4_CH2  (via drill 0.25)
  Top 0.127: v11.75,14.5 10.75,14.5 U1.F17
  Bottom 0.127: v11.75,14.5 13.3,12.95 22.03,12.95 22.44,13.37 25.24,13.37 28.19,10.41 32.64,10.41 JP6.10
TIM4_CH3
  Top 0.127: JP6.8 32.64,12.95 30.86,12.95 28.41,10.5 24.75,10.5 U1.C3
UART4_RX  (via drill 0.25)
  Top 0.127: U1.M18 v8.75,19.5
  Bottom 0.127: v8.75,19.5 6.15,19.5 5.15,20.5 4.5,20.5 3.74,20.5 2.92,19.68 2.92,18.54 2.41,18.03 1.02,18.03 0.38,17.4 0.38,16.26 1.14,15.49 2.92,15.49 JP4.6
UART4_TX
  Top 0.127: RN2.1 0.7,24.56 0.83,24.43 0.83,20.57 0.83,20.39 0.76,20.32 0.45,20 0.38,19.94 0.38,13.59 1.02,12.95 2.29,12.95 2.74,12.5 3.56,11.68 JP4.8 7.75,11.68 8.8,10.63 12.67,10.63 13.03,11 U1.C14
USBH_DM
  Top 0.127: U1.K18 8.46,18 arc90 8.24,17.78 arc-90 8.02,17.55 7.94,17.55 arc-90 7.72,17.78 arc90 7.5,18 7.23,18 arc90 7.01,17.78 arc-90 6.79,17.55 6.67,17.55 arc-90 6.45,17.78 arc90 6.22,18 5.43,18 JP4.4
USBH_DP
  Top 0.127: U1.K17 9.75,18.5 5,18.5 JP4.2
USD_DETECT  (via drill 0.25)
  Top 0.127: v14,25.5 14.75,25.5 U1.V12 14.88,26.38 13.75,27.5 9.25,27.5 6.75,30 RN5.3
  Bottom 0.127: 14.07,27.25 J1.10 14.03,25.53 v14,25.5
VBAT  (via drill 0.33)
  Bottom 1.27: X4.1 9.41,5.09 10.56,3.94 v14.22,3.94 v14.99,3.94 v15.75,3.94 15.75,1.86 17.96,1.86 20.17,4.06 JP6.13 JP6.14
  pour Top (isolate 0.254, no thermals): 13.72,0.25 13.72,4.19 16.76,4.19 16.76,0.25
VBUS  (via drill 0.25, 0.33)
  Top 0.254: U1.K8 v18.75,17.5 | U1.K9 v17.75,17.5
  other vias: 16.26,7.11 17.14,7.11 17.14,6.22 16.26,6.22
  pour Top (isolate 0.254, rank 3, no thermals): 15.88,5.84 15.88,7.87 21.59,7.87 21.59,4.57 15.88,4.57
  pour 3V3 (isolate 0.254): 17.41,4.57 15.88,4.57 15.88,18.03 18.92,18.03 18.92,17.14 17.41,17.14
VBUS_SW  (via drill 0.25)
  Top 0.254: U1.J8 v18.75,16.5 | U1.J9 v17.75,16.5
  other vias: 11.75,16.5 12.75,16.5 12.75,15.5 11.75,15.5 7.5,4.5 7.5,5.25 8.25,5.25 8.25,4.5
  pour Bottom (isolate 0.305, no thermals): 3.25,3.25 3.25,17 19.5,17 19.5,15.75 19.5,3.25
  pour 3V3 (isolate 0.254, no thermals): 13,17 13,14.75 9.25,14.75 9.25,4.25 7.25,4.25 7.25,17
VDD  (via drill 0.25)
  Top 0.254: U1.L7 v20.75,19.5 | U1.K7 v20.75,18.5 | U1.J7 v20.75,17.5 | U1.H7 v20.75,16.5 | U1.G7 v20.75,15.5 | U1.L4 v22.75,19.5 | U1.K4 v22.75,18.5 | U1.K3 v23.75,18.5 | U1.M7 v20.75,20.5 | U1.M4 v22.75,20.5
  pour 3V3: 20.5,15.25 20.5,20.75 24,20.75 24,18.25 24,15.25
VDDA  (via drill 0.41)
  Top 0.33: X3.4 v21.53,44.33
  Bottom 0.61: v21.53,44.33 21.53,42.8
VIN  (via drill 0.25, 0.33)
  Top 0.254: U1.L9 v18.75,18.5 | U1.L8 v19.75,18.5 | U1.M8 v19.75,19.5 | U1.M9 v18.75,19.5 | U1.H8 v19.75,15.5 | U1.H9 v18.75,15.5 | U1.H1 v25.75,15.5 | U1.H2 v24.75,15.5 | U1.G3 v23.75,14.5 | U1.G2 v24.75,14.5 | U1.G1 v25.75,14.5
  other vias: 17.4,3.81 18.41,3.81 17.4,2.92
  pour Top (isolate 0.254, no thermals): 17.14,0.25 17.14,4.19 18.8,4.19 18.8,0.25
  pour 3V3 (isolate 0.254): 15.89,20.75 20.13,20.75 20.13,14.75 24.53,14.75 24.53,15.75 26.5,15.75 26.5,11.87 19,11.78 19,3.5 17.75,3.51 17.75,2.5 17.25,2.5 17.14,2.5 17.14,3.42 17.14,4.25 17.75,4.25 17.75,15.75 19.25,15.75 19.25,18.29 15.89,18.29

## Text on the board
tPlace: P0 | P10 | PWR | RST | P1 | P11 | P19 | BOT | P2 | P12 | P18 | FSIN | P3 | P13 | P17 | P9 | P4 | P14 | P16 | P8 | P5 | P15 | 3v3 | P7 | P6 | 5v | VBAT | VBAT | 3v3 | 3v3 | GND | GND
bPlace: https://openmv.io | OpenMV-H7 R1 | 10/27/18 | LED1=Red | LED2=Green | LED3=Blue | LED4=IR | Max voltage: 5v